# EAGLE board MyoWare_Cable_Shield_Panel_v10 (EAGLE 7.4.0), part 1 of 2
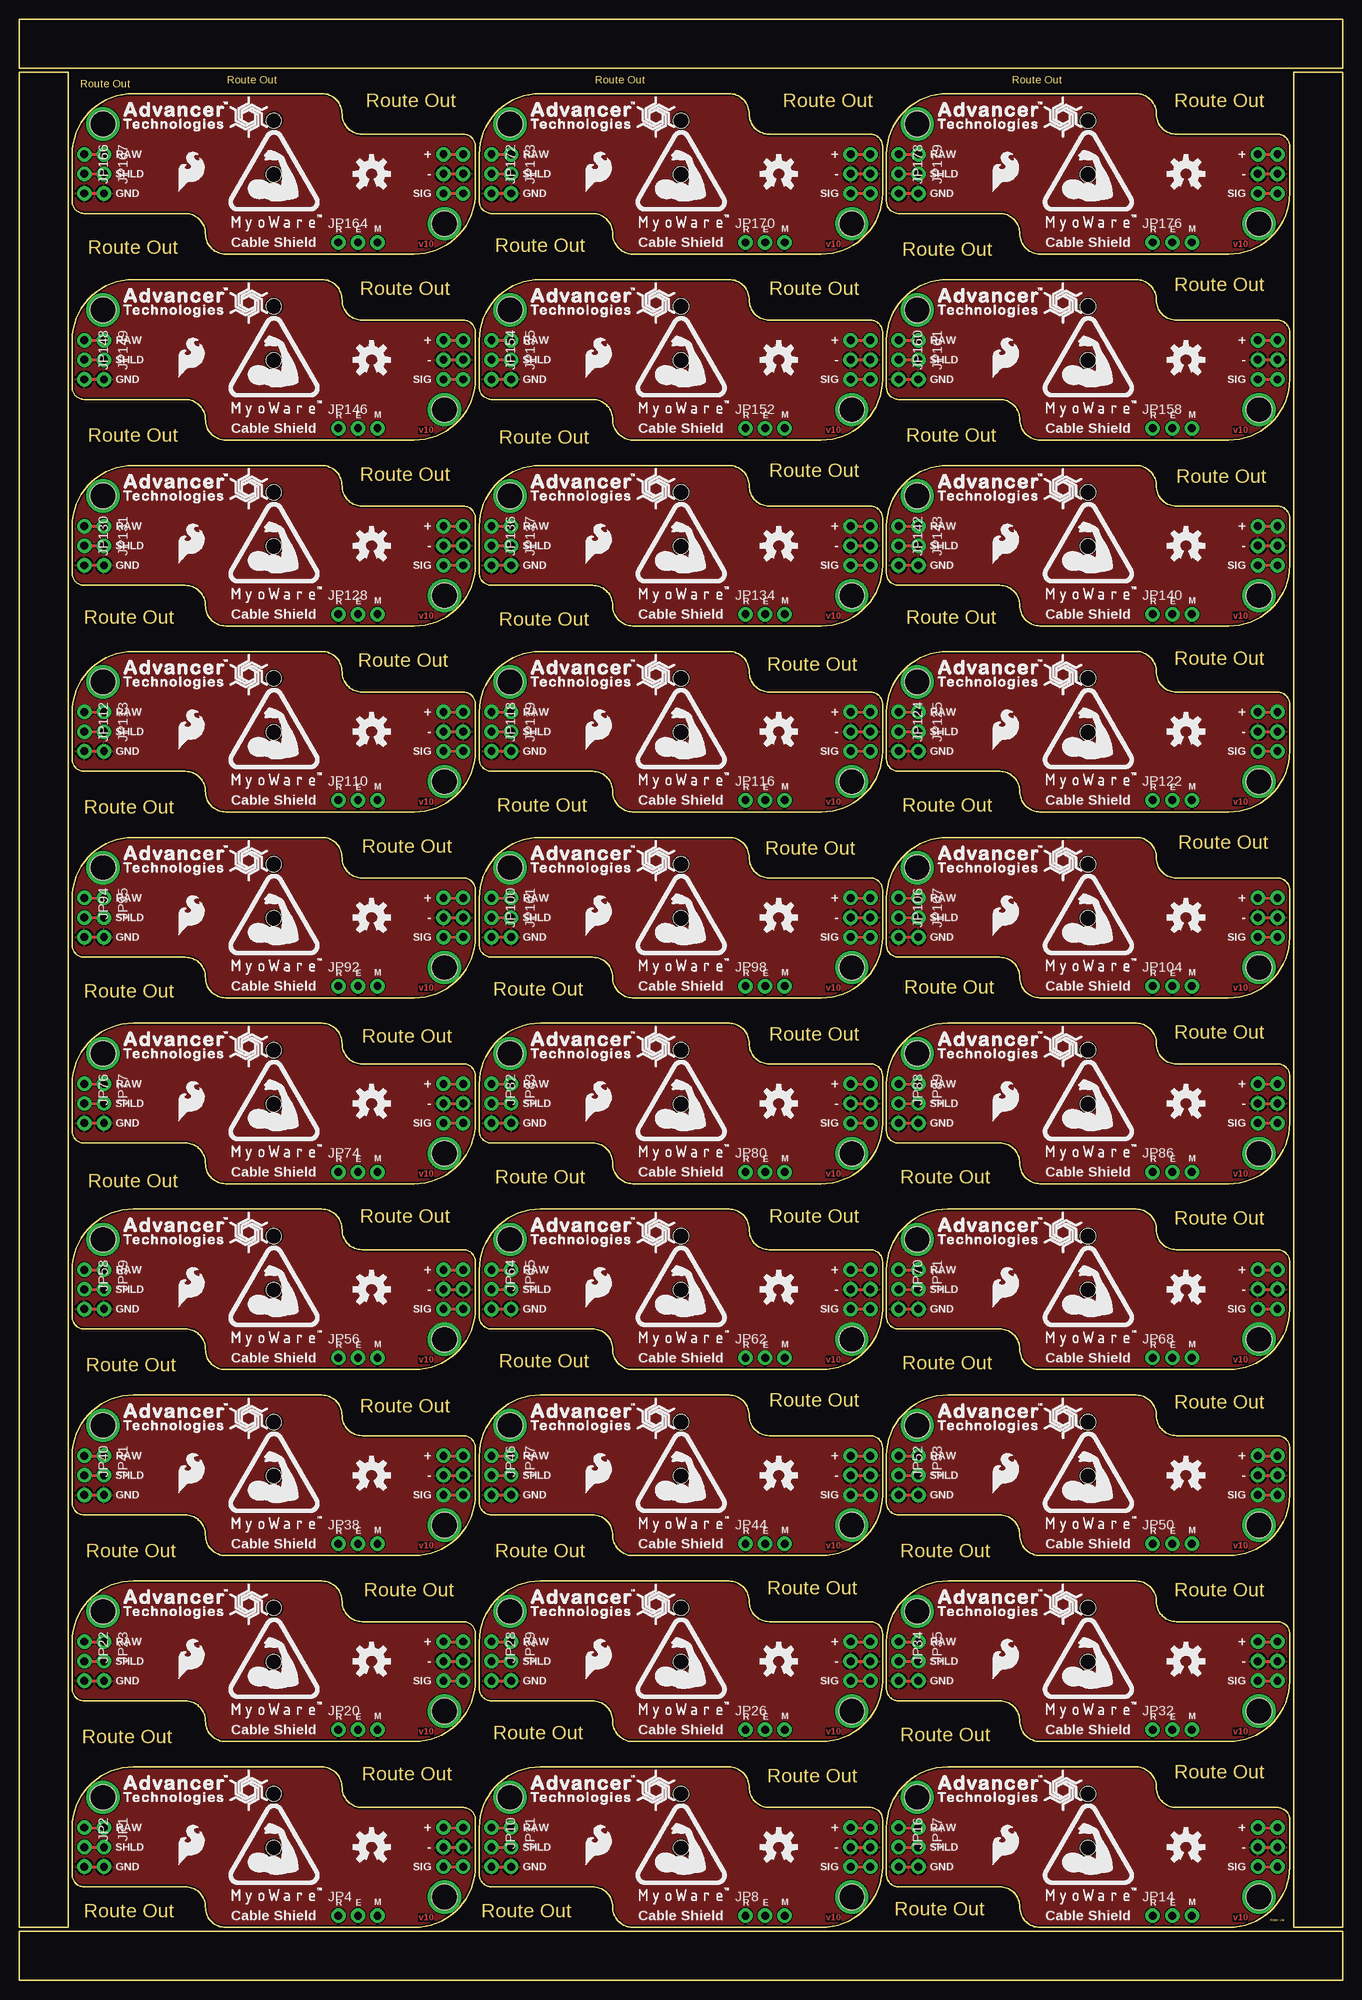
[diagram p0: board, top side]
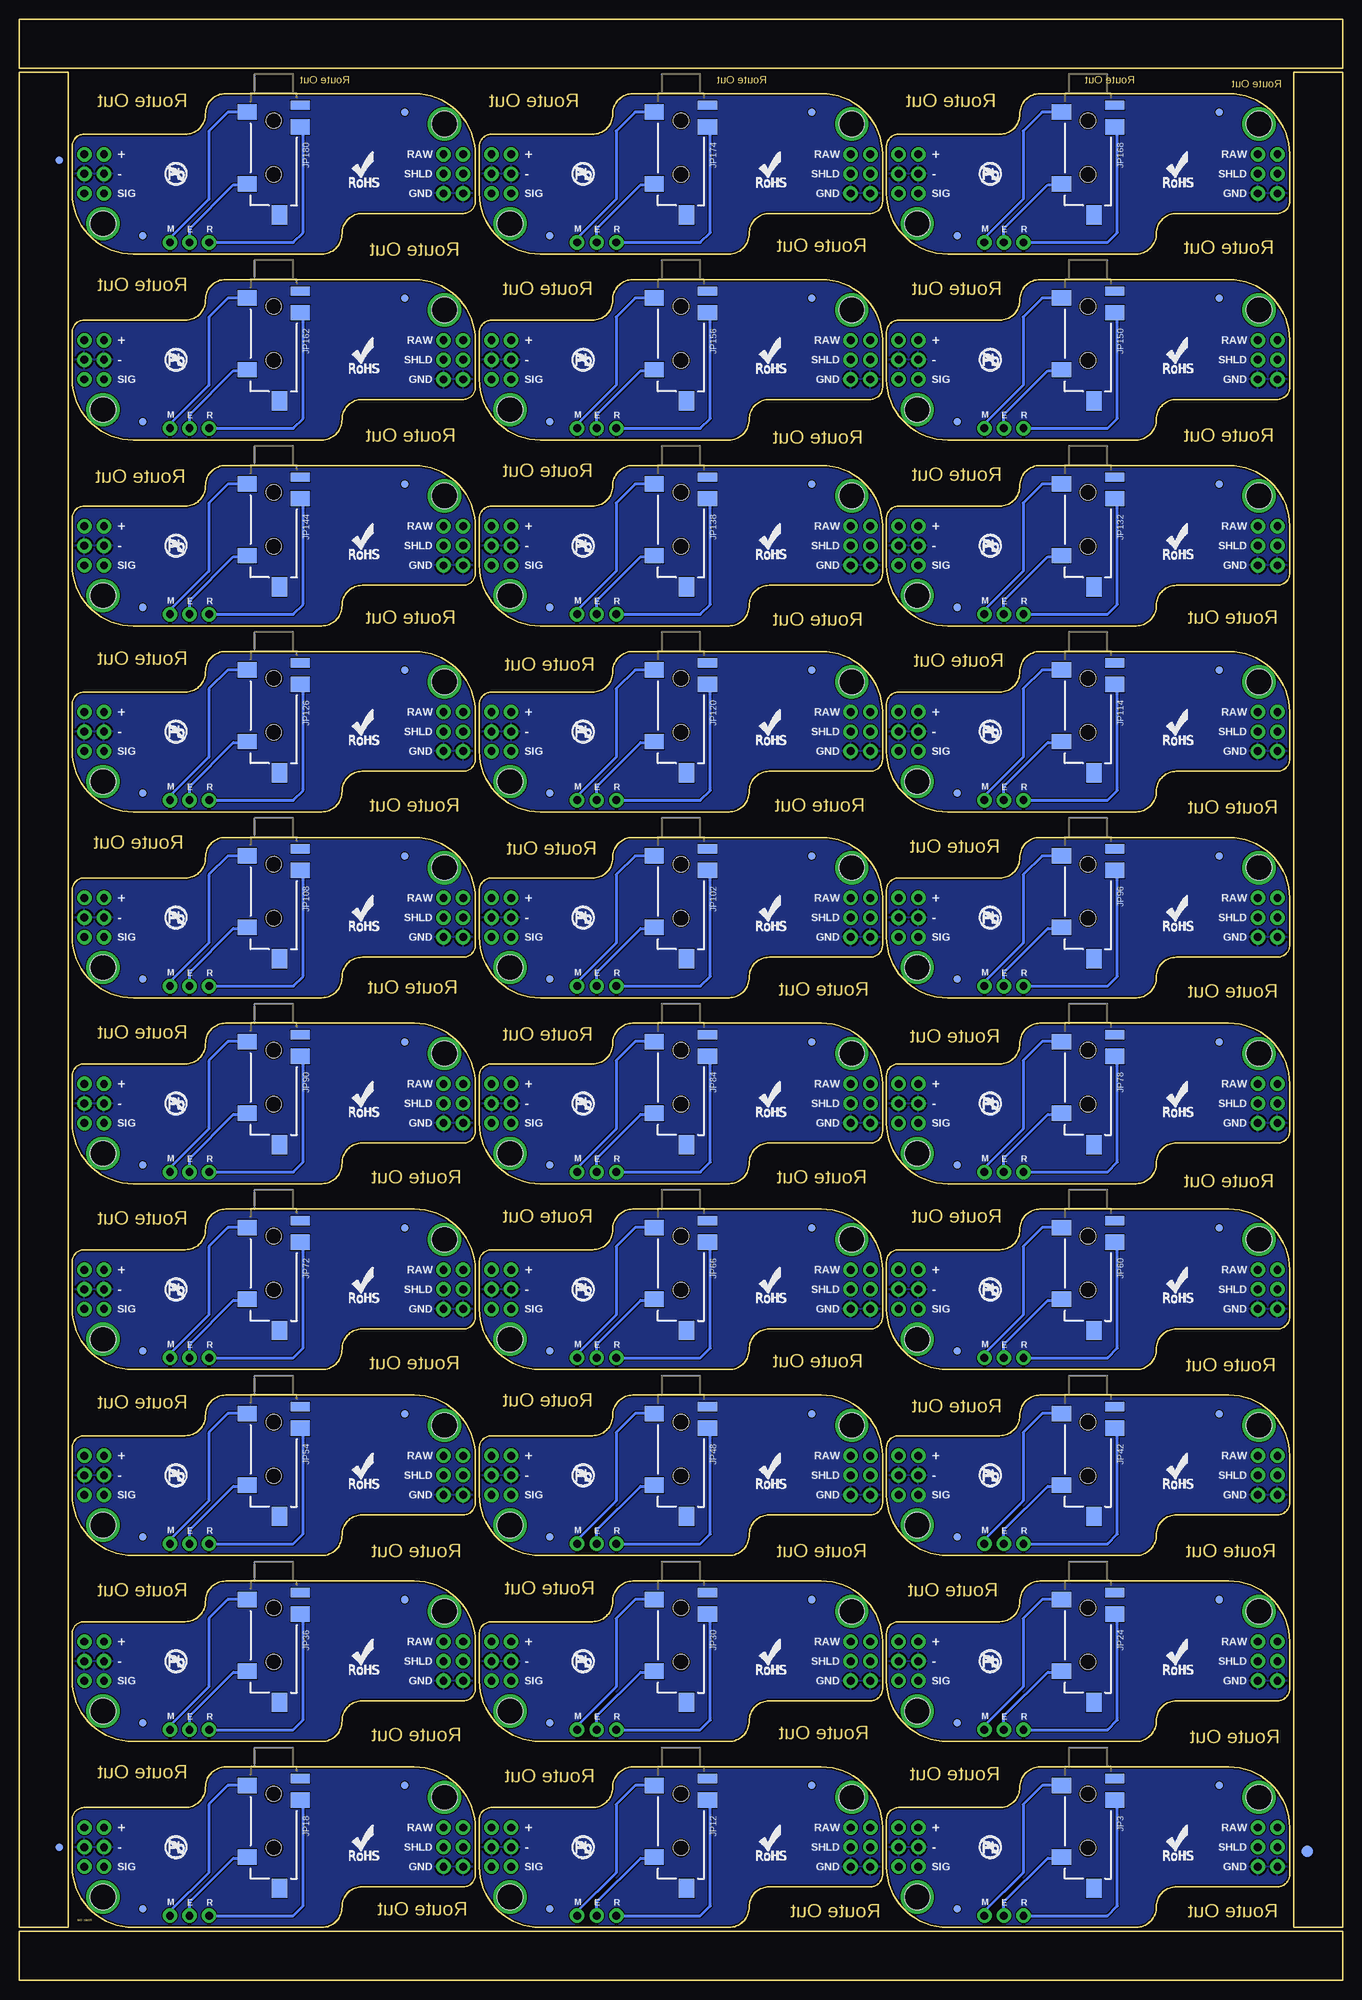
[diagram p1: board, bottom side, seen from below]

Size 171.7 x 254.51 mm. Coordinates in mm from the lower left corner, seen from the top.
Outline: 444 segments
Copper layers (1*16): Top 0.035mm / dielectric 1.5mm / Bottom 0.035mm
Design rules "Gold_Phoenix_Standard_Spec_2_layer": minimum track width 5mil, minimum drill 6mil, track to track 5mil, track to pad 5mil, pad to pad 5mil, via to via 5mil, smd to smd 5mil, copper to edge 8mil, drill to drill 8mil, minimum pad ring 5mil, minimum via ring 5mil, stop-mask expansion 4mil, vias tented up to drill 20mil, thermal gap 10mil

## Footprints (pad centres in the part's own frame; a part is rotated, then mirrored left to right if it is on the bottom)
FIDUCIAL-1.5X3 = smd 1.5 x 1.5: 1 0,0
FIDUCIAL-1X2 = smd 1 x 1: 1 0,0
1X03_NO_SILK = drill 1.016 pad 1.88: 1 0,0; 2 2.54,0; 3 5.08,0
AUDIO-JACK-3.5MM-SMD = smd 2 x 2.5: RING 4.3,3.45; SLEEVE 2.4,-3.45; TIP 11.7,-3.45 | smd 1.2 x 2.5: RSH 1.5,3.45 | smd 2.5 x 2: TSH 15.75,0.75 | hole 2: 3.5,0; 10.5,0
STAND-OFF = hole 3.302: 0,0

## Placement (x,y rotation side)
E$1  [FIDUCIAL-1.5X3]  4.57,16.76 0 bottom
E$7  [FIDUCIAL-1X2]  166.5,236.22 180 bottom
E$8  [FIDUCIAL-1X2]  166.5,17.27 0 bottom
FID1  FIDUCIAL1X2  [FIDUCIAL-1X2]  50.02,9.27 0 bottom
FID2  FIDUCIAL1X2  [FIDUCIAL-1X2]  16.02,25.27 0 bottom
FID3  FIDUCIAL1X2  [FIDUCIAL-1X2]  68.85,25.27 0 bottom
FID4  FIDUCIAL1X2  [FIDUCIAL-1X2]  102.85,9.27 0 bottom
FID5  FIDUCIAL1X2  [FIDUCIAL-1X2]  121.68,25.27 0 bottom
FID6  FIDUCIAL1X2  [FIDUCIAL-1X2]  155.68,9.27 0 bottom
FID7  FIDUCIAL1X2  [FIDUCIAL-1X2]  16.02,49.4 0 bottom
FID8  FIDUCIAL1X2  [FIDUCIAL-1X2]  50.02,33.4 0 bottom
FID9  FIDUCIAL1X2  [FIDUCIAL-1X2]  68.85,49.4 0 bottom
FID10  FIDUCIAL1X2  [FIDUCIAL-1X2]  102.85,33.4 0 bottom
FID11  FIDUCIAL1X2  [FIDUCIAL-1X2]  121.68,49.4 0 bottom
FID12  FIDUCIAL1X2  [FIDUCIAL-1X2]  155.68,33.4 0 bottom
FID13  FIDUCIAL1X2  [FIDUCIAL-1X2]  16.02,73.53 0 bottom
FID14  FIDUCIAL1X2  [FIDUCIAL-1X2]  50.02,57.53 0 bottom
FID15  FIDUCIAL1X2  [FIDUCIAL-1X2]  68.85,73.53 0 bottom
FID16  FIDUCIAL1X2  [FIDUCIAL-1X2]  102.85,57.53 0 bottom
FID17  FIDUCIAL1X2  [FIDUCIAL-1X2]  121.68,73.53 0 bottom
FID18  FIDUCIAL1X2  [FIDUCIAL-1X2]  155.68,57.53 0 bottom
FID19  FIDUCIAL1X2  [FIDUCIAL-1X2]  16.02,97.66 0 bottom
FID20  FIDUCIAL1X2  [FIDUCIAL-1X2]  50.02,81.66 0 bottom
FID21  FIDUCIAL1X2  [FIDUCIAL-1X2]  68.85,97.66 0 bottom
FID22  FIDUCIAL1X2  [FIDUCIAL-1X2]  102.85,81.66 0 bottom
FID23  FIDUCIAL1X2  [FIDUCIAL-1X2]  121.68,97.66 0 bottom
FID24  FIDUCIAL1X2  [FIDUCIAL-1X2]  155.68,81.66 0 bottom
FID25  FIDUCIAL1X2  [FIDUCIAL-1X2]  16.02,121.79 0 bottom
FID26  FIDUCIAL1X2  [FIDUCIAL-1X2]  50.02,105.79 0 bottom
FID27  FIDUCIAL1X2  [FIDUCIAL-1X2]  68.85,121.79 0 bottom
FID28  FIDUCIAL1X2  [FIDUCIAL-1X2]  102.85,105.79 0 bottom
FID29  FIDUCIAL1X2  [FIDUCIAL-1X2]  121.68,121.79 0 bottom
FID30  FIDUCIAL1X2  [FIDUCIAL-1X2]  155.68,105.79 0 bottom
FID31  FIDUCIAL1X2  [FIDUCIAL-1X2]  16.02,145.92 0 bottom
FID32  FIDUCIAL1X2  [FIDUCIAL-1X2]  50.02,129.92 0 bottom
FID33  FIDUCIAL1X2  [FIDUCIAL-1X2]  68.85,145.92 0 bottom
FID34  FIDUCIAL1X2  [FIDUCIAL-1X2]  102.85,129.92 0 bottom
FID35  FIDUCIAL1X2  [FIDUCIAL-1X2]  121.68,145.92 0 bottom
FID36  FIDUCIAL1X2  [FIDUCIAL-1X2]  155.68,129.92 0 bottom
FID37  FIDUCIAL1X2  [FIDUCIAL-1X2]  16.02,170.05 0 bottom
FID38  FIDUCIAL1X2  [FIDUCIAL-1X2]  50.02,154.05 0 bottom
FID39  FIDUCIAL1X2  [FIDUCIAL-1X2]  68.85,170.05 0 bottom
FID40  FIDUCIAL1X2  [FIDUCIAL-1X2]  102.85,154.05 0 bottom
FID41  FIDUCIAL1X2  [FIDUCIAL-1X2]  121.68,170.05 0 bottom
FID42  FIDUCIAL1X2  [FIDUCIAL-1X2]  155.68,154.05 0 bottom
FID43  FIDUCIAL1X2  [FIDUCIAL-1X2]  16.02,194.18 0 bottom
FID44  FIDUCIAL1X2  [FIDUCIAL-1X2]  50.02,178.18 0 bottom
FID45  FIDUCIAL1X2  [FIDUCIAL-1X2]  68.85,194.18 0 bottom
FID46  FIDUCIAL1X2  [FIDUCIAL-1X2]  102.85,178.18 0 bottom
FID47  FIDUCIAL1X2  [FIDUCIAL-1X2]  121.68,194.18 0 bottom
FID48  FIDUCIAL1X2  [FIDUCIAL-1X2]  155.68,178.18 0 bottom
FID49  FIDUCIAL1X2  [FIDUCIAL-1X2]  16.02,218.31 0 bottom
FID50  FIDUCIAL1X2  [FIDUCIAL-1X2]  50.02,202.31 0 bottom
FID51  FIDUCIAL1X2  [FIDUCIAL-1X2]  68.85,218.31 0 bottom
FID52  FIDUCIAL1X2  [FIDUCIAL-1X2]  102.85,202.31 0 bottom
FID53  FIDUCIAL1X2  [FIDUCIAL-1X2]  121.68,218.31 0 bottom
FID54  FIDUCIAL1X2  [FIDUCIAL-1X2]  155.68,202.31 0 bottom
FID55  FIDUCIAL1X2  [FIDUCIAL-1X2]  16.02,242.44 0 bottom
FID56  FIDUCIAL1X2  [FIDUCIAL-1X2]  50.02,226.44 0 bottom
FID57  FIDUCIAL1X2  [FIDUCIAL-1X2]  68.85,242.44 0 bottom
FID58  FIDUCIAL1X2  [FIDUCIAL-1X2]  102.85,226.44 0 bottom
FID59  FIDUCIAL1X2  [FIDUCIAL-1X2]  121.68,242.44 0 bottom
FID60  FIDUCIAL1X2  [FIDUCIAL-1X2]  155.68,226.44 0 bottom
JP1  Power  [1X03_NO_SILK]  10.99,19.81 270 top
JP2  Power  [1X03_NO_SILK]  8.45,19.81 270 top
JP3  3.5mm Jack  [AUDIO-JACK-3.5MM-SMD]  33.02,27.69 270 bottom
JP4  Power  [1X03_NO_SILK]  41.4,8.38 0 top
JP5  Power  [1X03_NO_SILK]  57.59,19.81 270 top
JP6  Power  [1X03_NO_SILK]  55.05,19.81 270 top
JP7  Power  [1X03_NO_SILK]  107.89,19.81 270 top
JP8  Power  [1X03_NO_SILK]  94.23,8.38 0 top
JP9  Power  [1X03_NO_SILK]  110.43,19.81 270 top
JP10  Power  [1X03_NO_SILK]  61.28,19.81 270 top
JP11  Power  [1X03_NO_SILK]  63.82,19.81 270 top
JP12  3.5mm Jack  [AUDIO-JACK-3.5MM-SMD]  85.85,27.69 270 bottom
JP13  Power  [1X03_NO_SILK]  160.72,19.81 270 top
JP14  Power  [1X03_NO_SILK]  147.07,8.38 0 top
JP15  Power  [1X03_NO_SILK]  163.26,19.81 270 top
JP16  Power  [1X03_NO_SILK]  114.11,19.81 270 top
JP17  Power  [1X03_NO_SILK]  116.65,19.81 270 top
JP18  3.5mm Jack  [AUDIO-JACK-3.5MM-SMD]  138.68,27.69 270 bottom
JP19  Power  [1X03_NO_SILK]  55.05,43.94 270 top
JP20  Power  [1X03_NO_SILK]  41.4,32.51 0 top
JP21  Power  [1X03_NO_SILK]  57.59,43.94 270 top
JP22  Power  [1X03_NO_SILK]  8.45,43.94 270 top
JP23  Power  [1X03_NO_SILK]  10.99,43.94 270 top
JP24  3.5mm Jack  [AUDIO-JACK-3.5MM-SMD]  33.02,51.82 270 bottom
JP25  Power  [1X03_NO_SILK]  107.89,43.94 270 top
JP26  Power  [1X03_NO_SILK]  94.23,32.51 0 top
JP27  Power  [1X03_NO_SILK]  110.43,43.94 270 top
JP28  Power  [1X03_NO_SILK]  61.28,43.94 270 top
JP29  Power  [1X03_NO_SILK]  63.82,43.94 270 top
JP30  3.5mm Jack  [AUDIO-JACK-3.5MM-SMD]  85.85,51.82 270 bottom
JP31  Power  [1X03_NO_SILK]  160.72,43.94 270 top
JP32  Power  [1X03_NO_SILK]  147.07,32.51 0 top
JP33  Power  [1X03_NO_SILK]  163.26,43.94 270 top
JP34  Power  [1X03_NO_SILK]  114.11,43.94 270 top
JP35  Power  [1X03_NO_SILK]  116.65,43.94 270 top
JP36  3.5mm Jack  [AUDIO-JACK-3.5MM-SMD]  138.68,51.82 270 bottom
JP37  Power  [1X03_NO_SILK]  55.05,68.07 270 top
JP38  Power  [1X03_NO_SILK]  41.4,56.64 0 top
JP39  Power  [1X03_NO_SILK]  57.59,68.07 270 top
JP40  Power  [1X03_NO_SILK]  8.45,68.07 270 top
JP41  Power  [1X03_NO_SILK]  10.99,68.07 270 top
JP42  3.5mm Jack  [AUDIO-JACK-3.5MM-SMD]  33.02,75.95 270 bottom
JP43  Power  [1X03_NO_SILK]  107.89,68.07 270 top
JP44  Power  [1X03_NO_SILK]  94.23,56.64 0 top
JP45  Power  [1X03_NO_SILK]  110.43,68.07 270 top
JP46  Power  [1X03_NO_SILK]  61.28,68.07 270 top
JP47  Power  [1X03_NO_SILK]  63.82,68.07 270 top
JP48  3.5mm Jack  [AUDIO-JACK-3.5MM-SMD]  85.85,75.95 270 bottom
JP49  Power  [1X03_NO_SILK]  160.72,68.07 270 top
JP50  Power  [1X03_NO_SILK]  147.07,56.64 0 top
JP51  Power  [1X03_NO_SILK]  163.26,68.07 270 top
JP52  Power  [1X03_NO_SILK]  114.11,68.07 270 top
JP53  Power  [1X03_NO_SILK]  116.65,68.07 270 top
JP54  3.5mm Jack  [AUDIO-JACK-3.5MM-SMD]  138.68,75.95 270 bottom
JP55  Power  [1X03_NO_SILK]  55.05,92.2 270 top
JP56  Power  [1X03_NO_SILK]  41.4,80.77 0 top
JP57  Power  [1X03_NO_SILK]  57.59,92.2 270 top
JP58  Power  [1X03_NO_SILK]  8.45,92.2 270 top
JP59  Power  [1X03_NO_SILK]  10.99,92.2 270 top
JP60  3.5mm Jack  [AUDIO-JACK-3.5MM-SMD]  33.02,100.08 270 bottom
JP61  Power  [1X03_NO_SILK]  107.89,92.2 270 top
JP62  Power  [1X03_NO_SILK]  94.23,80.77 0 top
JP63  Power  [1X03_NO_SILK]  110.43,92.2 270 top
JP64  Power  [1X03_NO_SILK]  61.28,92.2 270 top
JP65  Power  [1X03_NO_SILK]  63.82,92.2 270 top
JP66  3.5mm Jack  [AUDIO-JACK-3.5MM-SMD]  85.85,100.08 270 bottom
JP67  Power  [1X03_NO_SILK]  160.72,92.2 270 top
JP68  Power  [1X03_NO_SILK]  147.07,80.77 0 top
JP69  Power  [1X03_NO_SILK]  163.26,92.2 270 top
JP70  Power  [1X03_NO_SILK]  114.11,92.2 270 top
JP71  Power  [1X03_NO_SILK]  116.65,92.2 270 top
JP72  3.5mm Jack  [AUDIO-JACK-3.5MM-SMD]  138.68,100.08 270 bottom
JP73  Power  [1X03_NO_SILK]  55.05,116.33 270 top
JP74  Power  [1X03_NO_SILK]  41.4,104.9 0 top
JP75  Power  [1X03_NO_SILK]  57.59,116.33 270 top
JP76  Power  [1X03_NO_SILK]  8.45,116.33 270 top
JP77  Power  [1X03_NO_SILK]  10.99,116.33 270 top
JP78  3.5mm Jack  [AUDIO-JACK-3.5MM-SMD]  33.02,124.21 270 bottom
JP79  Power  [1X03_NO_SILK]  107.89,116.33 270 top
JP80  Power  [1X03_NO_SILK]  94.23,104.9 0 top
JP81  Power  [1X03_NO_SILK]  110.43,116.33 270 top
JP82  Power  [1X03_NO_SILK]  61.28,116.33 270 top
JP83  Power  [1X03_NO_SILK]  63.82,116.33 270 top
JP84  3.5mm Jack  [AUDIO-JACK-3.5MM-SMD]  85.85,124.21 270 bottom
JP85  Power  [1X03_NO_SILK]  160.72,116.33 270 top
JP86  Power  [1X03_NO_SILK]  147.07,104.9 0 top
JP87  Power  [1X03_NO_SILK]  163.26,116.33 270 top
JP88  Power  [1X03_NO_SILK]  114.11,116.33 270 top
JP89  Power  [1X03_NO_SILK]  116.65,116.33 270 top
JP90  3.5mm Jack  [AUDIO-JACK-3.5MM-SMD]  138.68,124.21 270 bottom
JP91  Power  [1X03_NO_SILK]  55.05,140.46 270 top
JP92  Power  [1X03_NO_SILK]  41.4,129.03 0 top
JP93  Power  [1X03_NO_SILK]  57.59,140.46 270 top
JP94  Power  [1X03_NO_SILK]  8.45,140.46 270 top
JP95  Power  [1X03_NO_SILK]  10.99,140.46 270 top
JP96  3.5mm Jack  [AUDIO-JACK-3.5MM-SMD]  33.02,148.34 270 bottom
JP97  Power  [1X03_NO_SILK]  107.89,140.46 270 top
JP98  Power  [1X03_NO_SILK]  94.23,129.03 0 top
JP99  Power  [1X03_NO_SILK]  110.43,140.46 270 top
JP100  Power  [1X03_NO_SILK]  61.28,140.46 270 top
JP101  Power  [1X03_NO_SILK]  63.82,140.46 270 top
JP102  3.5mm Jack  [AUDIO-JACK-3.5MM-SMD]  85.85,148.34 270 bottom
JP103  Power  [1X03_NO_SILK]  160.72,140.46 270 top
JP104  Power  [1X03_NO_SILK]  147.07,129.03 0 top
JP105  Power  [1X03_NO_SILK]  163.26,140.46 270 top
JP106  Power  [1X03_NO_SILK]  114.11,140.46 270 top
JP107  Power  [1X03_NO_SILK]  116.65,140.46 270 top
JP108  3.5mm Jack  [AUDIO-JACK-3.5MM-SMD]  138.68,148.34 270 bottom
JP109  Power  [1X03_NO_SILK]  55.05,164.59 270 top
JP110  Power  [1X03_NO_SILK]  41.4,153.16 0 top
JP111  Power  [1X03_NO_SILK]  57.59,164.59 270 top
JP112  Power  [1X03_NO_SILK]  8.45,164.59 270 top
JP113  Power  [1X03_NO_SILK]  10.99,164.59 270 top
JP114  3.5mm Jack  [AUDIO-JACK-3.5MM-SMD]  33.02,172.47 270 bottom
JP115  Power  [1X03_NO_SILK]  107.89,164.59 270 top
JP116  Power  [1X03_NO_SILK]  94.23,153.16 0 top
JP117  Power  [1X03_NO_SILK]  110.43,164.59 270 top
JP118  Power  [1X03_NO_SILK]  61.28,164.59 270 top
JP119  Power  [1X03_NO_SILK]  63.82,164.59 270 top
JP120  3.5mm Jack  [AUDIO-JACK-3.5MM-SMD]  85.85,172.47 270 bottom
JP121  Power  [1X03_NO_SILK]  160.72,164.59 270 top
JP122  Power  [1X03_NO_SILK]  147.07,153.16 0 top
JP123  Power  [1X03_NO_SILK]  163.26,164.59 270 top
JP124  Power  [1X03_NO_SILK]  114.11,164.59 270 top
JP125  Power  [1X03_NO_SILK]  116.65,164.59 270 top
JP126  3.5mm Jack  [AUDIO-JACK-3.5MM-SMD]  138.68,172.47 270 bottom
JP127  Power  [1X03_NO_SILK]  55.05,188.72 270 top
JP128  Power  [1X03_NO_SILK]  41.4,177.29 0 top
JP129  Power  [1X03_NO_SILK]  57.59,188.72 270 top
JP130  Power  [1X03_NO_SILK]  8.45,188.72 270 top
JP131  Power  [1X03_NO_SILK]  10.99,188.72 270 top
JP132  3.5mm Jack  [AUDIO-JACK-3.5MM-SMD]  33.02,196.6 270 bottom
JP133  Power  [1X03_NO_SILK]  107.89,188.72 270 top
JP134  Power  [1X03_NO_SILK]  94.23,177.29 0 top
JP135  Power  [1X03_NO_SILK]  110.43,188.72 270 top
JP136  Power  [1X03_NO_SILK]  61.28,188.72 270 top
JP137  Power  [1X03_NO_SILK]  63.82,188.72 270 top
JP138  3.5mm Jack  [AUDIO-JACK-3.5MM-SMD]  85.85,196.6 270 bottom
JP139  Power  [1X03_NO_SILK]  160.72,188.72 270 top
JP140  Power  [1X03_NO_SILK]  147.07,177.29 0 top
JP141  Power  [1X03_NO_SILK]  163.26,188.72 270 top
JP142  Power  [1X03_NO_SILK]  114.11,188.72 270 top
JP143  Power  [1X03_NO_SILK]  116.65,188.72 270 top
JP144  3.5mm Jack  [AUDIO-JACK-3.5MM-SMD]  138.68,196.6 270 bottom
JP145  Power  [1X03_NO_SILK]  55.05,212.85 270 top
JP146  Power  [1X03_NO_SILK]  41.4,201.42 0 top
JP147  Power  [1X03_NO_SILK]  57.59,212.85 270 top
JP148  Power  [1X03_NO_SILK]  8.45,212.85 270 top
JP149  Power  [1X03_NO_SILK]  10.99,212.85 270 top
JP150  3.5mm Jack  [AUDIO-JACK-3.5MM-SMD]  33.02,220.73 270 bottom
JP151  Power  [1X03_NO_SILK]  107.89,212.85 270 top
JP152  Power  [1X03_NO_SILK]  94.23,201.42 0 top
JP153  Power  [1X03_NO_SILK]  110.43,212.85 270 top
JP154  Power  [1X03_NO_SILK]  61.28,212.85 270 top
JP155  Power  [1X03_NO_SILK]  63.82,212.85 270 top
JP156  3.5mm Jack  [AUDIO-JACK-3.5MM-SMD]  85.85,220.73 270 bottom
JP157  Power  [1X03_NO_SILK]  160.72,212.85 270 top
JP158  Power  [1X03_NO_SILK]  147.07,201.42 0 top
JP159  Power  [1X03_NO_SILK]  163.26,212.85 270 top
JP160  Power  [1X03_NO_SILK]  114.11,212.85 270 top
JP161  Power  [1X03_NO_SILK]  116.65,212.85 270 top
JP162  3.5mm Jack  [AUDIO-JACK-3.5MM-SMD]  138.68,220.73 270 bottom
JP163  Power  [1X03_NO_SILK]  55.05,236.98 270 top
JP164  Power  [1X03_NO_SILK]  41.4,225.55 0 top
JP165  Power  [1X03_NO_SILK]  57.59,236.98 270 top
JP166  Power  [1X03_NO_SILK]  8.45,236.98 270 top
JP167  Power  [1X03_NO_SILK]  10.99,236.98 270 top
JP168  3.5mm Jack  [AUDIO-JACK-3.5MM-SMD]  33.02,244.86 270 bottom
JP169  Power  [1X03_NO_SILK]  107.89,236.98 270 top
JP170  Power  [1X03_NO_SILK]  94.23,225.55 0 top
JP171  Power  [1X03_NO_SILK]  110.43,236.98 270 top
JP172  Power  [1X03_NO_SILK]  61.28,236.98 270 top
JP173  Power  [1X03_NO_SILK]  63.82,236.98 270 top
JP174  3.5mm Jack  [AUDIO-JACK-3.5MM-SMD]  85.85,244.86 270 bottom
JP175  Power  [1X03_NO_SILK]  160.72,236.98 270 top
JP176  Power  [1X03_NO_SILK]  147.07,225.55 0 top
JP177  Power  [1X03_NO_SILK]  163.26,236.98 270 top
JP178  Power  [1X03_NO_SILK]  114.11,236.98 270 top
JP179  Power  [1X03_NO_SILK]  116.65,236.98 270 top
JP180  3.5mm Jack  [AUDIO-JACK-3.5MM-SMD]  138.68,244.86 270 bottom
LOGO  [MYOWARE_LOGO]  33.02,16.38 0 top
LOGO1  SFE_LOGO_FLAME.2_INCH  [SFE_LOGO_FLAME_.2]  20.32,14.73 0 top
LOGO2  OSHW-LOGOM  [OSHW-LOGO-M]  45.72,17.27 0 top
LOGO3  [MYOWARE_LOGO]  85.85,16.38 0 top
LOGO4  OSHW-LOGOM  [OSHW-LOGO-M]  98.55,17.27 0 top
LOGO5  SFE_LOGO_FLAME.2_INCH  [SFE_LOGO_FLAME_.2]  73.15,14.73 0 top
LOGO6  [MYOWARE_LOGO]  138.68,16.38 0 top
LOGO7  OSHW-LOGOM  [OSHW-LOGO-M]  151.38,17.27 0 top
LOGO8  SFE_LOGO_FLAME.2_INCH  [SFE_LOGO_FLAME_.2]  125.98,14.73 0 top
LOGO9  [MYOWARE_LOGO]  33.02,40.51 0 top
LOGO10  OSHW-LOGOM  [OSHW-LOGO-M]  45.72,41.4 0 top
LOGO11  SFE_LOGO_FLAME.2_INCH  [SFE_LOGO_FLAME_.2]  20.32,38.86 0 top
LOGO12  [MYOWARE_LOGO]  85.85,40.51 0 top
LOGO13  OSHW-LOGOM  [OSHW-LOGO-M]  98.55,41.4 0 top
LOGO14  SFE_LOGO_FLAME.2_INCH  [SFE_LOGO_FLAME_.2]  73.15,38.86 0 top
LOGO15  [MYOWARE_LOGO]  138.68,40.51 0 top
LOGO16  OSHW-LOGOM  [OSHW-LOGO-M]  151.38,41.4 0 top
LOGO17  SFE_LOGO_FLAME.2_INCH  [SFE_LOGO_FLAME_.2]  125.98,38.86 0 top
LOGO18  [MYOWARE_LOGO]  33.02,64.64 0 top
LOGO19  OSHW-LOGOM  [OSHW-LOGO-M]  45.72,65.53 0 top
LOGO20  SFE_LOGO_FLAME.2_INCH  [SFE_LOGO_FLAME_.2]  20.32,62.99 0 top
LOGO21  [MYOWARE_LOGO]  85.85,64.64 0 top
LOGO22  OSHW-LOGOM  [OSHW-LOGO-M]  98.55,65.53 0 top
LOGO23  SFE_LOGO_FLAME.2_INCH  [SFE_LOGO_FLAME_.2]  73.15,62.99 0 top
LOGO24  [MYOWARE_LOGO]  138.68,64.64 0 top
LOGO25  OSHW-LOGOM  [OSHW-LOGO-M]  151.38,65.53 0 top
LOGO26  SFE_LOGO_FLAME.2_INCH  [SFE_LOGO_FLAME_.2]  125.98,62.99 0 top
LOGO27  [MYOWARE_LOGO]  33.02,88.77 0 top
LOGO28  OSHW-LOGOM  [OSHW-LOGO-M]  45.72,89.66 0 top
LOGO29  SFE_LOGO_FLAME.2_INCH  [SFE_LOGO_FLAME_.2]  20.32,87.12 0 top
LOGO30  [MYOWARE_LOGO]  85.85,88.77 0 top
LOGO31  OSHW-LOGOM  [OSHW-LOGO-M]  98.55,89.66 0 top
LOGO32  SFE_LOGO_FLAME.2_INCH  [SFE_LOGO_FLAME_.2]  73.15,87.12 0 top
LOGO33  [MYOWARE_LOGO]  138.68,88.77 0 top
LOGO34  OSHW-LOGOM  [OSHW-LOGO-M]  151.38,89.66 0 top
LOGO35  SFE_LOGO_FLAME.2_INCH  [SFE_LOGO_FLAME_.2]  125.98,87.12 0 top
LOGO36  [MYOWARE_LOGO]  33.02,112.9 0 top
LOGO37  OSHW-LOGOM  [OSHW-LOGO-M]  45.72,113.79 0 top
LOGO38  SFE_LOGO_FLAME.2_INCH  [SFE_LOGO_FLAME_.2]  20.32,111.25 0 top
LOGO39  [MYOWARE_LOGO]  85.85,112.9 0 top
LOGO40  OSHW-LOGOM  [OSHW-LOGO-M]  98.55,113.79 0 top
LOGO41  SFE_LOGO_FLAME.2_INCH  [SFE_LOGO_FLAME_.2]  73.15,111.25 0 top
LOGO42  [MYOWARE_LOGO]  138.68,112.9 0 top
LOGO43  OSHW-LOGOM  [OSHW-LOGO-M]  151.38,113.79 0 top
LOGO44  SFE_LOGO_FLAME.2_INCH  [SFE_LOGO_FLAME_.2]  125.98,111.25 0 top
LOGO45  [MYOWARE_LOGO]  33.02,137.03 0 top
LOGO46  OSHW-LOGOM  [OSHW-LOGO-M]  45.72,137.92 0 top
LOGO47  SFE_LOGO_FLAME.2_INCH  [SFE_LOGO_FLAME_.2]  20.32,135.38 0 top
LOGO48  [MYOWARE_LOGO]  85.85,137.03 0 top
LOGO49  OSHW-LOGOM  [OSHW-LOGO-M]  98.55,137.92 0 top
LOGO50  SFE_LOGO_FLAME.2_INCH  [SFE_LOGO_FLAME_.2]  73.15,135.38 0 top
LOGO51  [MYOWARE_LOGO]  138.68,137.03 0 top
LOGO52  OSHW-LOGOM  [OSHW-LOGO-M]  151.38,137.92 0 top
LOGO53  SFE_LOGO_FLAME.2_INCH  [SFE_LOGO_FLAME_.2]  125.98,135.38 0 top
LOGO54  [MYOWARE_LOGO]  33.02,161.16 0 top
LOGO55  OSHW-LOGOM  [OSHW-LOGO-M]  45.72,162.05 0 top
LOGO56  SFE_LOGO_FLAME.2_INCH  [SFE_LOGO_FLAME_.2]  20.32,159.51 0 top
LOGO57  [MYOWARE_LOGO]  85.85,161.16 0 top
LOGO58  OSHW-LOGOM  [OSHW-LOGO-M]  98.55,162.05 0 top
LOGO59  SFE_LOGO_FLAME.2_INCH  [SFE_LOGO_FLAME_.2]  73.15,159.51 0 top
LOGO60  [MYOWARE_LOGO]  138.68,161.16 0 top
LOGO61  OSHW-LOGOM  [OSHW-LOGO-M]  151.38,162.05 0 top
LOGO62  SFE_LOGO_FLAME.2_INCH  [SFE_LOGO_FLAME_.2]  125.98,159.51 0 top
LOGO63  [MYOWARE_LOGO]  33.02,185.29 0 top
LOGO64  OSHW-LOGOM  [OSHW-LOGO-M]  45.72,186.18 0 top
LOGO65  SFE_LOGO_FLAME.2_INCH  [SFE_LOGO_FLAME_.2]  20.32,183.64 0 top
LOGO66  [MYOWARE_LOGO]  85.85,185.29 0 top
LOGO67  OSHW-LOGOM  [OSHW-LOGO-M]  98.55,186.18 0 top
LOGO68  SFE_LOGO_FLAME.2_INCH  [SFE_LOGO_FLAME_.2]  73.15,183.64 0 top
LOGO69  [MYOWARE_LOGO]  138.68,185.29 0 top
LOGO70  OSHW-LOGOM  [OSHW-LOGO-M]  151.38,186.18 0 top
LOGO71  SFE_LOGO_FLAME.2_INCH  [SFE_LOGO_FLAME_.2]  125.98,183.64 0 top
LOGO72  [MYOWARE_LOGO]  33.02,209.42 0 top
LOGO73  OSHW-LOGOM  [OSHW-LOGO-M]  45.72,210.31 0 top
LOGO74  SFE_LOGO_FLAME.2_INCH  [SFE_LOGO_FLAME_.2]  20.32,207.77 0 top
LOGO75  [MYOWARE_LOGO]  85.85,209.42 0 top
LOGO76  OSHW-LOGOM  [OSHW-LOGO-M]  98.55,210.31 0 top
LOGO77  SFE_LOGO_FLAME.2_INCH  [SFE_LOGO_FLAME_.2]  73.15,207.77 0 top
LOGO78  [MYOWARE_LOGO]  138.68,209.42 0 top
LOGO79  OSHW-LOGOM  [OSHW-LOGO-M]  151.38,210.31 0 top
LOGO80  SFE_LOGO_FLAME.2_INCH  [SFE_LOGO_FLAME_.2]  125.98,207.77 0 top
LOGO81  [MYOWARE_LOGO]  33.02,233.55 0 top
LOGO82  OSHW-LOGOM  [OSHW-LOGO-M]  45.72,234.44 0 top
LOGO83  SFE_LOGO_FLAME.2_INCH  [SFE_LOGO_FLAME_.2]  20.32,231.9 0 top
LOGO84  [MYOWARE_LOGO]  85.85,233.55 0 top
LOGO85  OSHW-LOGOM  [OSHW-LOGO-M]  98.55,234.44 0 top
LOGO86  SFE_LOGO_FLAME.2_INCH  [SFE_LOGO_FLAME_.2]  73.15,231.9 0 top
LOGO87  [MYOWARE_LOGO]  138.68,233.55 0 top
LOGO88  OSHW-LOGOM  [OSHW-LOGO-M]  151.38,234.44 0 top
LOGO89  SFE_LOGO_FLAME.2_INCH  [SFE_LOGO_FLAME_.2]  125.98,231.9 0 top
SPIRAL  [SPIRAL_LOGO_60%]  29.81,24.65 0 top
SPIRAL1  [SPIRAL_LOGO_60%]  82.64,24.65 0 top
SPIRAL2  [SPIRAL_LOGO_60%]  135.47,24.65 0 top
SPIRAL3  [SPIRAL_LOGO_60%]  29.81,48.78 0 top
SPIRAL4  [SPIRAL_LOGO_60%]  82.64,48.78 0 top
SPIRAL5  [SPIRAL_LOGO_60%]  135.47,48.78 0 top
SPIRAL6  [SPIRAL_LOGO_60%]  29.81,72.91 0 top
SPIRAL7  [SPIRAL_LOGO_60%]  82.64,72.91 0 top
SPIRAL8  [SPIRAL_LOGO_60%]  135.47,72.91 0 top
SPIRAL9  [SPIRAL_LOGO_60%]  29.81,97.04 0 top
SPIRAL10  [SPIRAL_LOGO_60%]  82.64,97.04 0 top
SPIRAL11  [SPIRAL_LOGO_60%]  135.47,97.04 0 top
SPIRAL12  [SPIRAL_LOGO_60%]  29.81,121.17 0 top
SPIRAL13  [SPIRAL_LOGO_60%]  82.64,121.17 0 top
SPIRAL14  [SPIRAL_LOGO_60%]  135.47,121.17 0 top
SPIRAL15  [SPIRAL_LOGO_60%]  29.81,145.3 0 top
SPIRAL16  [SPIRAL_LOGO_60%]  82.64,145.3 0 top
SPIRAL17  [SPIRAL_LOGO_60%]  135.47,145.3 0 top
SPIRAL18  [SPIRAL_LOGO_60%]  29.81,169.43 0 top
SPIRAL19  [SPIRAL_LOGO_60%]  82.64,169.43 0 top
SPIRAL20  [SPIRAL_LOGO_60%]  135.47,169.43 0 top
SPIRAL21  [SPIRAL_LOGO_60%]  29.81,193.56 0 top
SPIRAL22  [SPIRAL_LOGO_60%]  82.64,193.56 0 top
SPIRAL23  [SPIRAL_LOGO_60%]  135.47,193.56 0 top
SPIRAL24  [SPIRAL_LOGO_60%]  29.81,217.69 0 top
SPIRAL25  [SPIRAL_LOGO_60%]  82.64,217.69 0 top
SPIRAL26  [SPIRAL_LOGO_60%]  135.47,217.69 0 top
SPIRAL27  [SPIRAL_LOGO_60%]  29.81,241.82 0 top
SPIRAL28  [SPIRAL_LOGO_60%]  82.64,241.82 0 top
SPIRAL29  [SPIRAL_LOGO_60%]  135.47,241.82 0 top
STANDOFF1  STAND-OFF  [STAND-OFF]  10.86,23.75 0 top
STANDOFF2  STAND-OFF  [STAND-OFF]  55.18,10.79 0 top
STANDOFF3  STAND-OFF  [STAND-OFF]  63.69,23.75 0 top
STANDOFF4  STAND-OFF  [STAND-OFF]  108.01,10.79 0 top
STANDOFF5  STAND-OFF  [STAND-OFF]  116.52,23.75 0 top
STANDOFF6  STAND-OFF  [STAND-OFF]  160.85,10.79 0 top
STANDOFF7  STAND-OFF  [STAND-OFF]  10.86,47.88 0 top
STANDOFF8  STAND-OFF  [STAND-OFF]  55.18,34.92 0 top
STANDOFF9  STAND-OFF  [STAND-OFF]  63.69,47.88 0 top
STANDOFF10  STAND-OFF  [STAND-OFF]  108.01,34.92 0 top
STANDOFF11  STAND-OFF  [STAND-OFF]  116.52,47.88 0 top
STANDOFF12  STAND-OFF  [STAND-OFF]  160.85,34.92 0 top
STANDOFF13  STAND-OFF  [STAND-OFF]  10.86,72.01 0 top
STANDOFF14  STAND-OFF  [STAND-OFF]  55.18,59.05 0 top
STANDOFF15  STAND-OFF  [STAND-OFF]  63.69,72.01 0 top
STANDOFF16  STAND-OFF  [STAND-OFF]  108.01,59.05 0 top
STANDOFF17  STAND-OFF  [STAND-OFF]  116.52,72.01 0 top
STANDOFF18  STAND-OFF  [STAND-OFF]  160.85,59.05 0 top
STANDOFF19  STAND-OFF  [STAND-OFF]  10.86,96.14 0 top
STANDOFF20  STAND-OFF  [STAND-OFF]  55.18,83.19 0 top
STANDOFF21  STAND-OFF  [STAND-OFF]  63.69,96.14 0 top
STANDOFF22  STAND-OFF  [STAND-OFF]  108.01,83.19 0 top
STANDOFF23  STAND-OFF  [STAND-OFF]  116.52,96.14 0 top
STANDOFF24  STAND-OFF  [STAND-OFF]  160.85,83.19 0 top
STANDOFF25  STAND-OFF  [STAND-OFF]  10.86,120.27 0 top
STANDOFF26  STAND-OFF  [STAND-OFF]  55.18,107.31 0 top
STANDOFF27  STAND-OFF  [STAND-OFF]  63.69,120.27 0 top
STANDOFF28  STAND-OFF  [STAND-OFF]  108.01,107.31 0 top
STANDOFF29  STAND-OFF  [STAND-OFF]  116.52,120.27 0 top
STANDOFF30  STAND-OFF  [STAND-OFF]  160.85,107.31 0 top
STANDOFF31  STAND-OFF  [STAND-OFF]  10.86,144.4 0 top
STANDOFF32  STAND-OFF  [STAND-OFF]  55.18,131.44 0 top
STANDOFF33  STAND-OFF  [STAND-OFF]  63.69,144.4 0 top
STANDOFF34  STAND-OFF  [STAND-OFF]  108.01,131.44 0 top
STANDOFF35  STAND-OFF  [STAND-OFF]  116.52,144.4 0 top
STANDOFF36  STAND-OFF  [STAND-OFF]  160.85,131.44 0 top
STANDOFF37  STAND-OFF  [STAND-OFF]  10.86,168.53 0 top
STANDOFF38  STAND-OFF  [STAND-OFF]  55.18,155.57 0 top
STANDOFF39  STAND-OFF  [STAND-OFF]  63.69,168.53 0 top
STANDOFF40  STAND-OFF  [STAND-OFF]  108.01,155.57 0 top
STANDOFF41  STAND-OFF  [STAND-OFF]  116.52,168.53 0 top
STANDOFF42  STAND-OFF  [STAND-OFF]  160.85,155.57 0 top
STANDOFF43  STAND-OFF  [STAND-OFF]  10.86,192.66 0 top
STANDOFF44  STAND-OFF  [STAND-OFF]  55.18,179.71 0 top
STANDOFF45  STAND-OFF  [STAND-OFF]  63.69,192.66 0 top
STANDOFF46  STAND-OFF  [STAND-OFF]  108.01,179.71 0 top
STANDOFF47  STAND-OFF  [STAND-OFF]  116.52,192.66 0 top
STANDOFF48  STAND-OFF  [STAND-OFF]  160.85,179.71 0 top
STANDOFF49  STAND-OFF  [STAND-OFF]  10.86,216.79 0 top
STANDOFF50  STAND-OFF  [STAND-OFF]  55.18,203.84 0 top
STANDOFF51  STAND-OFF  [STAND-OFF]  63.69,216.79 0 top
STANDOFF52  STAND-OFF  [STAND-OFF]  108.01,203.84 0 top
STANDOFF53  STAND-OFF  [STAND-OFF]  116.52,216.79 0 top
STANDOFF54  STAND-OFF  [STAND-OFF]  160.85,203.84 0 top
STANDOFF55  STAND-OFF  [STAND-OFF]  10.86,240.92 0 top
STANDOFF56  STAND-OFF  [STAND-OFF]  55.18,227.97 0 top
STANDOFF57  STAND-OFF  [STAND-OFF]  63.69,240.92 0 top
STANDOFF58  STAND-OFF  [STAND-OFF]  108.01,227.97 0 top
STANDOFF59  STAND-OFF  [STAND-OFF]  116.52,240.92 0 top
STANDOFF60  STAND-OFF  [STAND-OFF]  160.85,227.97 0 top
U$1  [NO_PB_LOGO_0.120]  100.26,15.37 0 bottom
U$2  [ADVANCER_LOGO]  72.76,24.5 0 top
U$3  [ROHS_LOGO_0.18_IN]  23.46,15.43 0 bottom
U$4  [ROHS_LOGO_0.18_IN]  76.3,15.43 0 bottom
U$5  [NO_PB_LOGO_0.120]  47.43,15.37 0 bottom
U$6  [ADVANCER_LOGO]  19.93,24.5 0 top
U$7  [NO_PB_LOGO_0.120]  153.09,15.37 0 bottom
U$8  [ADVANCER_LOGO]  125.6,24.5 0 top
U$9  [ROHS_LOGO_0.18_IN]  129.13,15.43 0 bottom
U$10  [NO_PB_LOGO_0.120]  47.43,39.5 0 bottom
U$11  [ADVANCER_LOGO]  19.93,48.63 0 top
U$12  [ROHS_LOGO_0.18_IN]  23.46,39.56 0 bottom
U$13  [NO_PB_LOGO_0.120]  100.26,39.5 0 bottom
U$14  [ADVANCER_LOGO]  72.76,48.63 0 top
U$15  [ROHS_LOGO_0.18_IN]  76.3,39.56 0 bottom
U$16  [NO_PB_LOGO_0.120]  153.09,39.5 0 bottom
U$17  [ADVANCER_LOGO]  125.6,48.63 0 top
U$18  [ROHS_LOGO_0.18_IN]  129.13,39.56 0 bottom
U$19  [NO_PB_LOGO_0.120]  47.43,63.63 0 bottom
U$20  [ADVANCER_LOGO]  19.93,72.76 0 top
U$21  [ROHS_LOGO_0.18_IN]  23.46,63.69 0 bottom
U$22  [NO_PB_LOGO_0.120]  100.26,63.63 0 bottom
U$23  [ADVANCER_LOGO]  72.76,72.76 0 top
U$24  [ROHS_LOGO_0.18_IN]  76.3,63.69 0 bottom
U$25  [NO_PB_LOGO_0.120]  153.09,63.63 0 bottom
U$26  [ADVANCER_LOGO]  125.6,72.76 0 top
U$27  [ROHS_LOGO_0.18_IN]  129.13,63.69 0 bottom
U$28  [NO_PB_LOGO_0.120]  47.43,87.76 0 bottom
U$29  [ADVANCER_LOGO]  19.93,96.89 0 top
U$30  [ROHS_LOGO_0.18_IN]  23.46,87.82 0 bottom
U$31  [NO_PB_LOGO_0.120]  100.26,87.76 0 bottom
U$32  [ADVANCER_LOGO]  72.76,96.89 0 top
U$33  [ROHS_LOGO_0.18_IN]  76.3,87.82 0 bottom
U$34  [NO_PB_LOGO_0.120]  153.09,87.76 0 bottom
U$35  [ADVANCER_LOGO]  125.6,96.89 0 top
U$36  [ROHS_LOGO_0.18_IN]  129.13,87.82 0 bottom
U$37  [NO_PB_LOGO_0.120]  47.43,111.89 0 bottom
U$38  [ADVANCER_LOGO]  19.93,121.02 0 top
U$39  [ROHS_LOGO_0.18_IN]  23.46,111.95 0 bottom
U$40  [NO_PB_LOGO_0.120]  100.26,111.89 0 bottom
U$41  [ADVANCER_LOGO]  72.76,121.02 0 top
U$42  [ROHS_LOGO_0.18_IN]  76.3,111.95 0 bottom
U$43  [NO_PB_LOGO_0.120]  153.09,111.89 0 bottom
U$44  [ADVANCER_LOGO]  125.6,121.02 0 top
U$45  [ROHS_LOGO_0.18_IN]  129.13,111.95 0 bottom
U$46  [NO_PB_LOGO_0.120]  47.43,136.02 0 bottom
U$47  [ADVANCER_LOGO]  19.93,145.15 0 top
U$48  [ROHS_LOGO_0.18_IN]  23.46,136.08 0 bottom
U$49  [NO_PB_LOGO_0.120]  100.26,136.02 0 bottom
U$50  [ADVANCER_LOGO]  72.76,145.15 0 top
U$51  [ROHS_LOGO_0.18_IN]  76.3,136.08 0 bottom
U$52  [NO_PB_LOGO_0.120]  153.09,136.02 0 bottom
U$53  [ADVANCER_LOGO]  125.6,145.15 0 top
U$54  [ROHS_LOGO_0.18_IN]  129.13,136.08 0 bottom
U$55  [NO_PB_LOGO_0.120]  47.43,160.15 0 bottom
U$56  [ADVANCER_LOGO]  19.93,169.28 0 top
U$57  [ROHS_LOGO_0.18_IN]  23.46,160.21 0 bottom
U$58  [NO_PB_LOGO_0.120]  100.26,160.15 0 bottom
U$59  [ADVANCER_LOGO]  72.76,169.28 0 top
U$60  [ROHS_LOGO_0.18_IN]  76.3,160.21 0 bottom
U$61  [NO_PB_LOGO_0.120]  153.09,160.15 0 bottom
U$62  [ADVANCER_LOGO]  125.6,169.28 0 top
U$63  [ROHS_LOGO_0.18_IN]  129.13,160.21 0 bottom
U$64  [NO_PB_LOGO_0.120]  47.43,184.28 0 bottom
U$65  [ADVANCER_LOGO]  19.93,193.41 0 top
U$66  [ROHS_LOGO_0.18_IN]  23.46,184.34 0 bottom
U$67  [NO_PB_LOGO_0.120]  100.26,184.28 0 bottom
U$68  [ADVANCER_LOGO]  72.76,193.41 0 top
U$69  [ROHS_LOGO_0.18_IN]  76.3,184.34 0 bottom
U$70  [NO_PB_LOGO_0.120]  153.09,184.28 0 bottom
U$71  [ADVANCER_LOGO]  125.6,193.41 0 top
U$72  [ROHS_LOGO_0.18_IN]  129.13,184.34 0 bottom
U$73  [NO_PB_LOGO_0.120]  47.43,208.41 0 bottom
U$74  [ADVANCER_LOGO]  19.93,217.54 0 top
U$75  [ROHS_LOGO_0.18_IN]  23.46,208.47 0 bottom
U$76  [NO_PB_LOGO_0.120]  100.26,208.41 0 bottom
U$77  [ADVANCER_LOGO]  72.76,217.54 0 top
U$78  [ROHS_LOGO_0.18_IN]  76.3,208.47 0 bottom
U$79  [NO_PB_LOGO_0.120]  153.09,208.41 0 bottom
U$80  [ADVANCER_LOGO]  125.6,217.54 0 top
U$81  [ROHS_LOGO_0.18_IN]  129.13,208.47 0 bottom
U$82  [NO_PB_LOGO_0.120]  47.43,232.54 0 bottom
U$83  [ADVANCER_LOGO]  19.93,241.67 0 top
U$84  [ROHS_LOGO_0.18_IN]  23.46,232.6 0 bottom
U$85  [NO_PB_LOGO_0.120]  100.26,232.54 0 bottom
U$86  [ADVANCER_LOGO]  72.76,241.67 0 top
U$87  [ROHS_LOGO_0.18_IN]  76.3,232.6 0 bottom
U$88  [NO_PB_LOGO_0.120]  153.09,232.54 0 bottom
U$89  [ADVANCER_LOGO]  125.6,241.67 0 top
U$90  [ROHS_LOGO_0.18_IN]  129.13,232.6 0 bottom

## Library data of the parts
E$1 = SparkFun-Retired
E$7 E$8 FID1-FID60 LOGO1 LOGO2 LOGO4 LOGO5 LOGO7 LOGO8 LOGO10 LOGO11 LOGO13 LOGO14 LOGO16 LOGO17 LOGO19 LOGO20 LOGO22 LOGO23 LOGO25 LOGO26 LOGO28 LOGO29 LOGO31 LOGO32 LOGO34 LOGO35 LOGO37 LOGO38 LOGO40 LOGO41 LOGO43 LOGO44 LOGO46 LOGO47 LOGO49 LOGO50 LOGO52 LOGO53 LOGO55 LOGO56 LOGO58 LOGO59 LOGO61 LOGO62 LOGO64 LOGO65 LOGO67 LOGO68 LOGO70 LOGO71 LOGO73 LOGO74 LOGO76 LOGO77 LOGO79 LOGO80 LOGO82 LOGO83 LOGO85 LOGO86 LOGO88 LOGO89 U$1 U$3-U$5 U$7 U$9 U$10 U$12 U$13 U$15 U$16 U$18 U$19 U$21 U$22 U$24 U$25 U$27 U$28 U$30 U$31 U$33 U$34 U$36 U$37 U$39 U$40 U$42 U$43 U$45 U$46 U$48 U$49 U$51 U$52 U$54 U$55 U$57 U$58 U$60 U$61 U$63 U$64 U$66 U$67 U$69 U$70 U$72 U$73 U$75 U$76 U$78 U$79 U$81 U$82 U$84 U$85 U$87 U$88 U$90 = SparkFun-Aesthetics
JP1 JP2 JP4-JP11 JP13-JP17 JP19-JP23 JP25-JP29 JP31-JP35 JP37-JP41 JP43-JP47 JP49-JP53 JP55-JP59 JP61-JP65 JP67-JP71 JP73-JP77 JP79-JP83 JP85-JP89 JP91-JP95 JP97-JP101 JP103-JP107 JP109-JP113 JP115-JP119 JP121-JP125 JP127-JP131 JP133-JP137 JP139-JP143 JP145-JP149 JP151-JP155 JP157-JP161 JP163-JP167 JP169-JP173 JP175-JP179 = SparkFun-Connectors
JP3 JP12 JP18 JP24 JP30 JP36 JP42 JP48 JP54 JP60 JP66 JP72 JP78 JP84 JP90 JP96 JP102 JP108 JP114 JP120 JP126 JP132 JP138 JP144 JP150 JP156 JP162 JP168 JP174 JP180 = SparkFun-Connectors; PROD_ID: CONN-10353
LOGO LOGO3 LOGO6 LOGO9 LOGO12 LOGO15 LOGO18 LOGO21 LOGO24 LOGO27 LOGO30 LOGO33 LOGO36 LOGO39 LOGO42 LOGO45 LOGO48 LOGO51 LOGO54 LOGO57 LOGO60 LOGO63 LOGO66 LOGO69 LOGO72 LOGO75 LOGO78 LOGO81 LOGO84 LOGO87 SPIRAL SPIRAL1-SPIRAL29 U$2 U$6 U$8 U$11 U$14 U$17 U$20 U$23 U$26 U$29 U$32 U$35 U$38 U$41 U$44 U$47 U$50 U$53 U$56 U$59 U$62 U$65 U$68 U$71 U$74 U$77 U$80 U$83 U$86 U$89 = advancer-technologies
STANDOFF1-STANDOFF60 = SparkFun-Electromechanical

## Nets
END: JP3.TIP JP4.2
END1: JP8.2 JP12.TIP
END2: JP14.2 JP18.TIP
END3: JP20.2 JP24.TIP
END4: JP26.2 JP30.TIP
END5: JP32.2 JP36.TIP
END6: JP38.2 JP42.TIP
END7: JP44.2 JP48.TIP
END8: JP50.2 JP54.TIP
END9: JP56.2 JP60.TIP
END10: JP62.2 JP66.TIP
END11: JP68.2 JP72.TIP
END12: JP74.2 JP78.TIP
END13: JP80.2 JP84.TIP
END14: JP86.2 JP90.TIP
END15: JP92.2 JP96.TIP
END16: JP98.2 JP102.TIP
END17: JP104.2 JP108.TIP
END18: JP110.2 JP114.TIP
END19: JP116.2 JP120.TIP
END20: JP122.2 JP126.TIP
END21: JP128.2 JP132.TIP
END22: JP134.2 JP138.TIP
END23: JP140.2 JP144.TIP
END24: JP146.2 JP150.TIP
END25: JP152.2 JP156.TIP
END26: JP158.2 JP162.TIP
END27: JP164.2 JP168.TIP
END28: JP170.2 JP174.TIP
END29: JP176.2 JP180.TIP
GND: JP1.3 JP2.3 JP5.2 JP6.2
GND1: JP7.2 JP9.2 JP10.3 JP11.3
GND2: JP13.2 JP15.2 JP16.3 JP17.3
GND3: JP19.2 JP21.2 JP22.3 JP23.3
GND4: JP25.2 JP27.2 JP28.3 JP29.3
GND5: JP31.2 JP33.2 JP34.3 JP35.3
GND6: JP37.2 JP39.2 JP40.3 JP41.3
GND7: JP43.2 JP45.2 JP46.3 JP47.3
GND8: JP49.2 JP51.2 JP52.3 JP53.3
GND9: JP55.2 JP57.2 JP58.3 JP59.3
GND10: JP61.2 JP63.2 JP64.3 JP65.3
GND11: JP67.2 JP69.2 JP70.3 JP71.3
GND12: JP73.2 JP75.2 JP76.3 JP77.3
GND13: JP79.2 JP81.2 JP82.3 JP83.3
GND14: JP85.2 JP87.2 JP88.3 JP89.3
GND15: JP91.2 JP93.2 JP94.3 JP95.3
GND16: JP97.2 JP99.2 JP100.3 JP101.3
GND17: JP103.2 JP105.2 JP106.3 JP107.3
GND18: JP109.2 JP111.2 JP112.3 JP113.3
GND19: JP115.2 JP117.2 JP118.3 JP119.3
GND20: JP121.2 JP123.2 JP124.3 JP125.3
GND21: JP127.2 JP129.2 JP130.3 JP131.3
GND22: JP133.2 JP135.2 JP136.3 JP137.3
GND23: JP139.2 JP141.2 JP142.3 JP143.3
GND24: JP145.2 JP147.2 JP148.3 JP149.3
GND25: JP151.2 JP153.2 JP154.3 JP155.3
GND26: JP157.2 JP159.2 JP160.3 JP161.3
GND27: JP163.2 JP165.2 JP166.3 JP167.3
GND28: JP169.2 JP171.2 JP172.3 JP173.3
GND29: JP175.2 JP177.2 JP178.3 JP179.3
MID: JP3.SLEEVE JP4.3
MID1: JP8.3 JP12.SLEEVE
MID2: JP14.3 JP18.SLEEVE
MID3: JP20.3 JP24.SLEEVE
MID4: JP26.3 JP30.SLEEVE
MID5: JP32.3 JP36.SLEEVE
MID6: JP38.3 JP42.SLEEVE
MID7: JP44.3 JP48.SLEEVE
MID8: JP50.3 JP54.SLEEVE
MID9: JP56.3 JP60.SLEEVE
MID10: JP62.3 JP66.SLEEVE
MID11: JP68.3 JP72.SLEEVE
MID12: JP74.3 JP78.SLEEVE
MID13: JP80.3 JP84.SLEEVE
MID14: JP86.3 JP90.SLEEVE
MID15: JP92.3 JP96.SLEEVE
MID16: JP98.3 JP102.SLEEVE
MID17: JP104.3 JP108.SLEEVE
MID18: JP110.3 JP114.SLEEVE
MID19: JP116.3 JP120.SLEEVE
MID20: JP122.3 JP126.SLEEVE
MID21: JP128.3 JP132.SLEEVE
MID22: JP134.3 JP138.SLEEVE
MID23: JP140.3 JP144.SLEEVE
MID24: JP146.3 JP150.SLEEVE
MID25: JP152.3 JP156.SLEEVE
MID26: JP158.3 JP162.SLEEVE
MID27: JP164.3 JP168.SLEEVE
MID28: JP170.3 JP174.SLEEVE
MID29: JP176.3 JP180.SLEEVE
RAW: JP1.1 JP2.1
RAW1: JP10.1 JP11.1
RAW2: JP16.1 JP17.1
RAW3: JP22.1 JP23.1
RAW4: JP28.1 JP29.1
RAW5: JP34.1 JP35.1
RAW6: JP40.1 JP41.1
RAW7: JP46.1 JP47.1
RAW8: JP52.1 JP53.1
RAW9: JP58.1 JP59.1
RAW10: JP64.1 JP65.1
RAW11: JP70.1 JP71.1
RAW12: JP76.1 JP77.1
RAW13: JP82.1 JP83.1
RAW14: JP88.1 JP89.1
RAW15: JP94.1 JP95.1
RAW16: JP100.1 JP101.1
RAW17: JP106.1 JP107.1
RAW18: JP112.1 JP113.1
RAW19: JP118.1 JP119.1
RAW20: JP124.1 JP125.1
RAW21: JP130.1 JP131.1
RAW22: JP136.1 JP137.1
RAW23: JP142.1 JP143.1
RAW24: JP148.1 JP149.1
RAW25: JP154.1 JP155.1
RAW26: JP160.1 JP161.1
RAW27: JP166.1 JP167.1
RAW28: JP172.1 JP173.1
RAW29: JP178.1 JP179.1
SHIELD: JP1.2 JP2.2
SHIELD1: JP10.2 JP11.2
SHIELD2: JP16.2 JP17.2
SHIELD3: JP22.2 JP23.2
SHIELD4: JP28.2 JP29.2
SHIELD5: JP34.2 JP35.2
SHIELD6: JP40.2 JP41.2
SHIELD7: JP46.2 JP47.2
SHIELD8: JP52.2 JP53.2
SHIELD9: JP58.2 JP59.2
SHIELD10: JP64.2 JP65.2
SHIELD11: JP70.2 JP71.2
SHIELD12: JP76.2 JP77.2
SHIELD13: JP82.2 JP83.2
SHIELD14: JP88.2 JP89.2
SHIELD15: JP94.2 JP95.2
SHIELD16: JP100.2 JP101.2
SHIELD17: JP106.2 JP107.2
SHIELD18: JP112.2 JP113.2
SHIELD19: JP118.2 JP119.2
SHIELD20: JP124.2 JP125.2
SHIELD21: JP130.2 JP131.2
SHIELD22: JP136.2 JP137.2
SHIELD23: JP142.2 JP143.2
SHIELD24: JP148.2 JP149.2
SHIELD25: JP154.2 JP155.2
SHIELD26: JP160.2 JP161.2
SHIELD27: JP166.2 JP167.2
SHIELD28: JP172.2 JP173.2
SHIELD29: JP178.2 JP179.2
SIG: JP5.3 JP6.3
SIG1: JP7.3 JP9.3
SIG2: JP13.3 JP15.3
SIG3: JP19.3 JP21.3
SIG4: JP25.3 JP27.3
SIG5: JP31.3 JP33.3
SIG6: JP37.3 JP39.3
SIG7: JP43.3 JP45.3
SIG8: JP49.3 JP51.3
SIG9: JP55.3 JP57.3
SIG10: JP61.3 JP63.3
SIG11: JP67.3 JP69.3
SIG12: JP73.3 JP75.3
SIG13: JP79.3 JP81.3
SIG14: JP85.3 JP87.3
SIG15: JP91.3 JP93.3
SIG16: JP97.3 JP99.3
SIG17: JP103.3 JP105.3
SIG18: JP109.3 JP111.3
SIG19: JP115.3 JP117.3
SIG20: JP121.3 JP123.3
SIG21: JP127.3 JP129.3
SIG22: JP133.3 JP135.3
SIG23: JP139.3 JP141.3
SIG24: JP145.3 JP147.3
SIG25: JP151.3 JP153.3
SIG26: JP157.3 JP159.3
SIG27: JP163.3 JP165.3
SIG28: JP169.3 JP171.3
SIG29: JP175.3 JP177.3
VCC: JP5.1 JP6.1
VCC1: JP7.1 JP9.1
VCC2: JP13.1 JP15.1
VCC3: JP19.1 JP21.1
VCC4: JP25.1 JP27.1
VCC5: JP31.1 JP33.1
VCC6: JP37.1 JP39.1
VCC7: JP43.1 JP45.1
VCC8: JP49.1 JP51.1
VCC9: JP55.1 JP57.1
VCC10: JP61.1 JP63.1
VCC11: JP67.1 JP69.1
VCC12: JP73.1 JP75.1
VCC13: JP79.1 JP81.1
VCC14: JP85.1 JP87.1
VCC15: JP91.1 JP93.1
VCC16: JP97.1 JP99.1
VCC17: JP103.1 JP105.1
VCC18: JP109.1 JP111.1
VCC19: JP115.1 JP117.1
VCC20: JP121.1 JP123.1
VCC21: JP127.1 JP129.1
VCC22: JP133.1 JP135.1
VCC23: JP139.1 JP141.1
VCC24: JP145.1 JP147.1
VCC25: JP151.1 JP153.1
VCC26: JP157.1 JP159.1
VCC27: JP163.1 JP165.1
VCC28: JP169.1 JP171.1
VCC29: JP175.1 JP177.1
VREF: JP3.RING JP4.1
VREF1: JP8.1 JP12.RING
VREF2: JP14.1 JP18.RING
VREF3: JP20.1 JP24.RING
VREF4: JP26.1 JP30.RING
VREF5: JP32.1 JP36.RING
VREF6: JP38.1 JP42.RING
VREF7: JP44.1 JP48.RING
VREF8: JP50.1 JP54.RING
VREF9: JP56.1 JP60.RING
VREF10: JP62.1 JP66.RING
VREF11: JP68.1 JP72.RING
VREF12: JP74.1 JP78.RING
VREF13: JP80.1 JP84.RING
VREF14: JP86.1 JP90.RING
VREF15: JP92.1 JP96.RING
VREF16: JP98.1 JP102.RING
VREF17: JP104.1 JP108.RING
VREF18: JP110.1 JP114.RING
VREF19: JP116.1 JP120.RING
VREF20: JP122.1 JP126.RING
VREF21: JP128.1 JP132.RING
VREF22: JP134.1 JP138.RING
VREF23: JP140.1 JP144.RING
VREF24: JP146.1 JP150.RING
VREF25: JP152.1 JP156.RING
VREF26: JP158.1 JP162.RING
VREF27: JP164.1 JP168.RING
VREF28: JP170.1 JP174.RING
VREF29: JP176.1 JP180.RING